# Altium PCB 400926.PcbDoc (part 2 of 7)
Units mm, origin at the board's own origin, x right, y up, seen from the top; angles counter-clockwise.
Board outline 148.5 x 63.5 mm, 4 copper layers (Top Layer, Mid-Layer 1, Mid-Layer 2, Bottom Layer), stack 1.514 mm thick; 311 components, 281 nets, 1495 pads, 2232 vias.
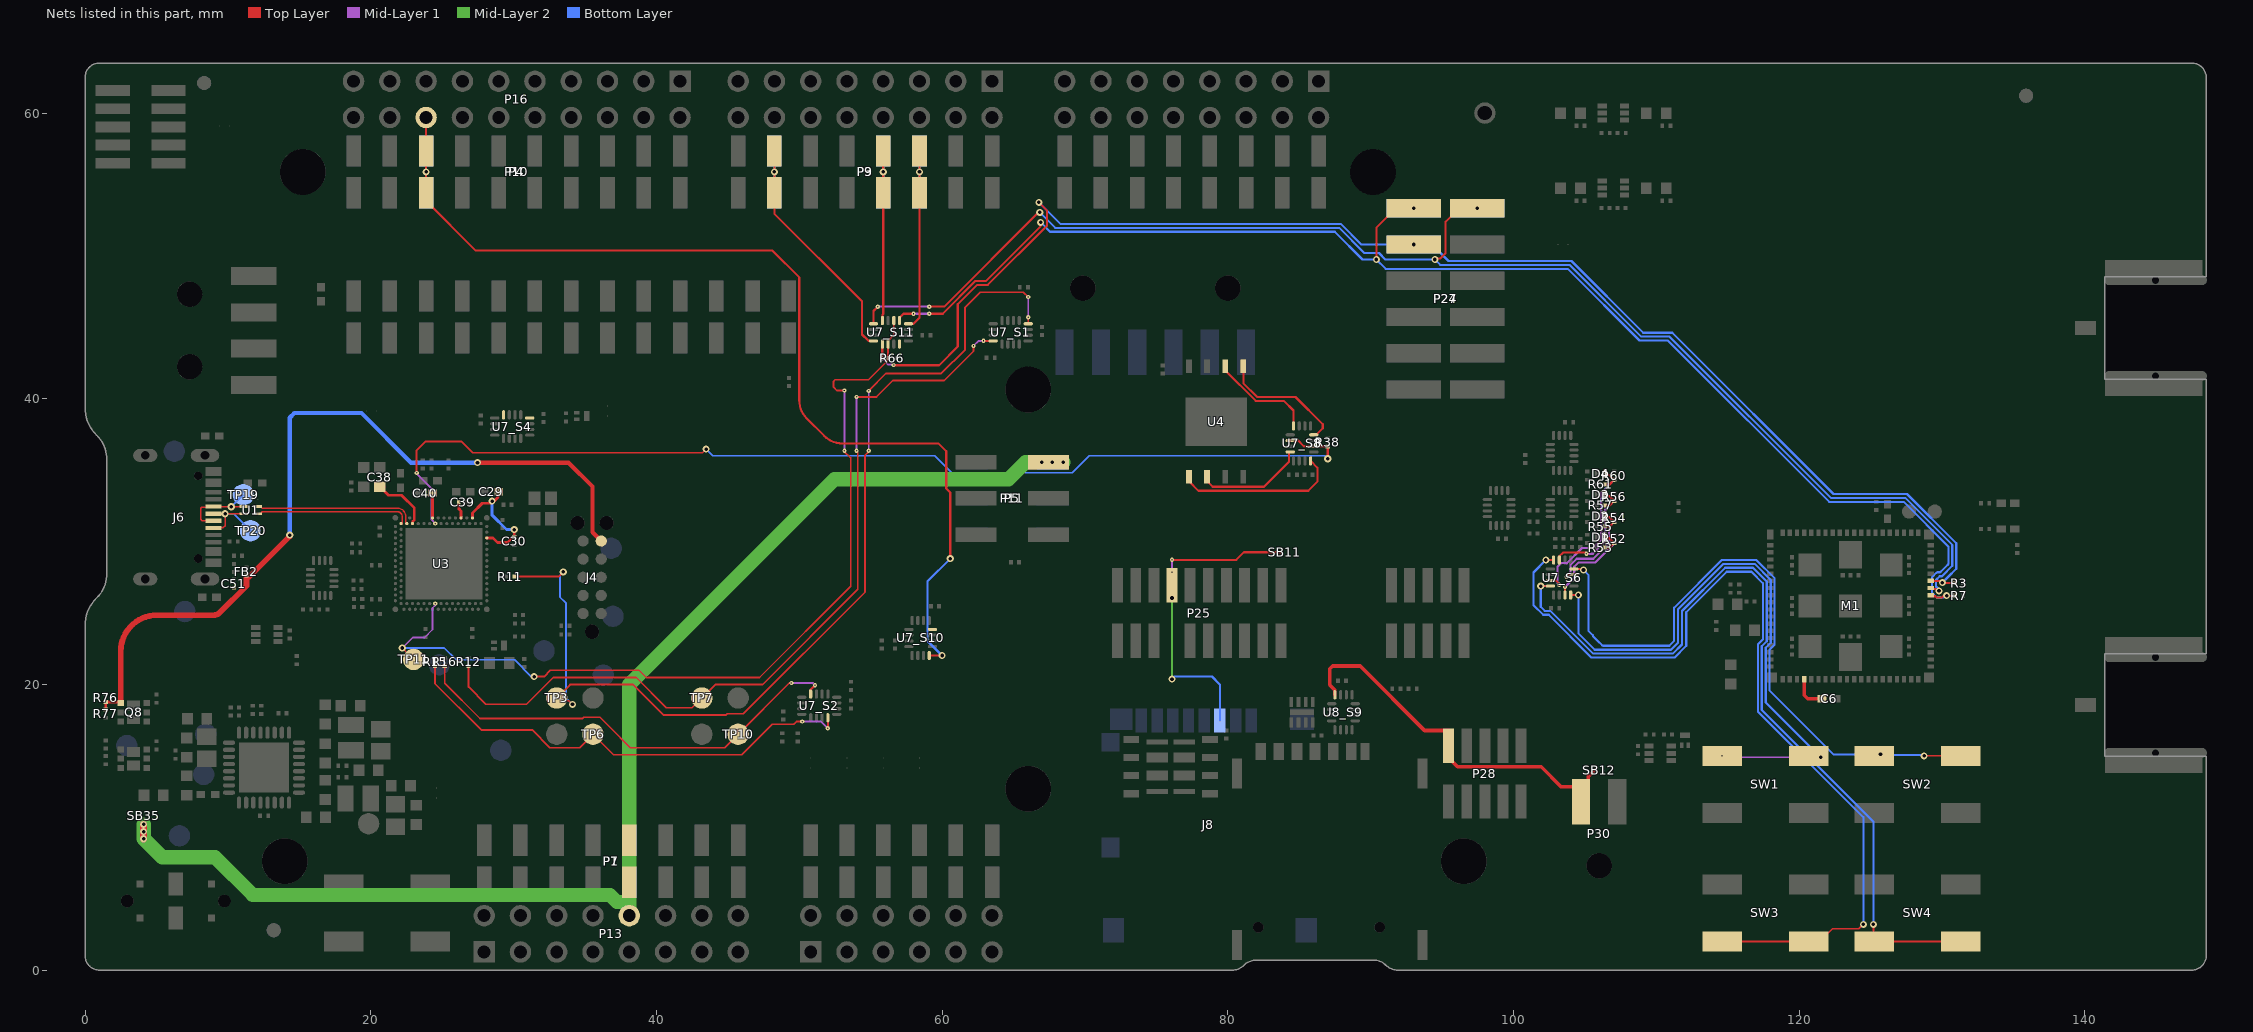
[diagram p4: the nets of this part, all layers, seen from the top]

## Footprints (in the part's own frame and the unit in brackets; to place one, negate y for a bottom-side part, rotate by r counter-clockwise, add the part's x,y. Pads: shape width x height; smd on the part's side, far side on the other; paste and mask are expansions set on the pad) (continued)
SOCKET_1x6_SMD [mm] "Socket, 2.54mm, SMD"
  rect 1.02x2.19 smd: 1(0,-1.465) 1(0,1.465) 2(2.54,-1.465) 2(2.54,1.465) 3(5.08,-1.465) 3(5.08,1.465) 4(7.62,-1.465) 4(7.62,1.465) 5(10.16,-1.465) 5(10.16,1.465) 6(12.7,1.465) 6(12.7,-1.465)
  silkscreen extent -1.27,-1.27 13.97,1.27, body extent -1.27,-2.29 13.97,2.29, height 7.47
SOCKET_1x8_SMD [mm] "Socket, 2.54mm, SMD"
  rect 1.02x2.19 smd: 1(0,-1.465) 1(0,1.465) 2(2.54,-1.465) 2(2.54,1.465) 3(5.08,-1.465) 3(5.08,1.465) 4(7.62,-1.465) 4(7.62,1.465) 5(10.16,-1.465) 5(10.16,1.465) 6(12.7,1.465) 6(12.7,-1.465) 7(15.24,-1.465) 7(15.24,1.465) 8(17.78,-1.465) 8(17.78,1.465)
  silkscreen extent -1.27,-1.27 19.05,1.27, body extent -1.27,-2.29 19.05,2.29, height 7.47
SOCKET_1x10_SMD [mm] "Socket, 2.54mm, SMD"
  rect 1.02x2.19 smd: 1(0,1.465) 1(0,-1.465) 2(2.54,-1.465) 2(2.54,1.465) 3(5.08,-1.465) 3(5.08,1.465) 4(7.62,-1.465) 4(7.62,1.465) 5(10.16,-1.465) 5(10.16,1.465) 6(12.7,-1.465) 6(12.7,1.465) 7(15.24,-1.465) 7(15.24,1.465) 8(17.78,-1.465) 8(17.78,1.465) 9(20.32,-1.465) 9(20.32,1.465) 10(22.86,-1.465) 10(22.86,1.465)
  silkscreen extent -1.27,-1.27 24.13,1.27, body extent -1.27,-2.29 24.13,2.29, height 7.47
SOCKET_2x3_SMD-2.54mm-NC [mm] "Socket, 2.54mm, SMD"
  rect 1.02x2.22 smd: 1(2.54,-2.825) 2(2.54,2.825) 3(0,-2.825) 4(0,2.825) 5(-2.54,-2.825) 6(-2.54,2.825)
  silkscreen extent -3.81,-3.3 3.81,2.54
SOCKET_2x6_SMD-2.54mm#1 [mil]
  rect 50x150 smd: 1(-250,-87.5) 2(-250,87.5) 3(-150,-87.5) 4(-150,87.5) 5(-50,-87.5) 6(-50,87.5) 7(50,-87.5) 8(50,87.5) 9(150,-87.5) 10(150,87.5) 11(250,-87.5) 12(250,87.5)
  silkscreen extent -310,-127 300,100, body extent -300,-138 300,139, height 290
SOCKET_2x6_SMD-2.54mm#2 [mil] "Board-Board Conn, Header, 4-way, 2-row"
  rect 50x150 smd: 1(-250,87.5) 2(-250,-87.5) 3(-150,87.5) 4(-150,-87.5) 5(-50,87.5) 6(-50,-87.5) 7(50,87.5) 8(50,-87.5) 9(150,87.5) 10(150,-87.5) 11(250,87.5) 12(250,-87.5)
  silkscreen extent -310,-100 300,127
SODFL35X40-2N [mm] "SODFL, 2-Leads, Body 0,60x0,35mm, IPC Medium Density"
  rect 0.25x0.6 smd: 1(-0.325,0) 3(0.325,0)
  body extent -0.53,-0.33 0.53,0.33, height 0.4
Solderbridge [mil]
  round 1 smd paste-99999: 1(-13.78,0) 2(13.78,0)
  Top Layer region: -7.49,19.36 -15.76,15.74 -21.55,8.8 -23.62,0 -23.62,0 -21.55,-8.79 -15.76,-15.74 -7.49,-19.36 -7.49,-19.36 -6.18,-19.31 -5.02,-18.71 -4.22,-17.68 -3.94,-16.4 -3.94,-16.4 -3.94,16.4 -4.22,17.68 -5.02,18.71 -6.18,19.31 -7.49,19.36
  Top Layer region: 7.49,-19.36 15.76,-15.74 21.55,-8.8 23.62,0 23.62,0 21.55,8.79 15.76,15.74 7.49,19.36 7.49,19.36 6.18,19.31 5.02,18.71 4.22,17.68 3.94,16.4 3.94,16.4 3.94,-16.4 4.22,-17.68 5.02,-18.71 6.18,-19.31 7.49,-19.36
Solderbridge_Shorted [mil]
  round 1 smd paste-99999: 1(-13.78,0) 2(13.78,0)
  Top Layer region: -4.92,3.94 -4.92,-3.94 4.92,-3.94 4.92,3.94
  Top Layer region: -7.49,19.36 -15.76,15.74 -21.55,8.8 -23.62,0 -23.62,0 -21.55,-8.79 -15.76,-15.74 -7.49,-19.36 -7.49,-19.36 -6.18,-19.31 -5.02,-18.71 -4.22,-17.68 -3.94,-16.4 -3.94,-16.4 -3.94,16.4 -4.22,17.68 -5.02,18.71 -6.18,19.31 -7.49,19.36
  Top Layer region: 7.49,-19.36 15.76,-15.74 21.55,-8.8 23.62,0 23.62,0 21.55,8.79 15.76,15.74 7.49,19.36 7.49,19.36 6.18,19.31 5.02,18.71 4.22,17.68 3.94,16.4 3.94,16.4 3.94,-16.4 4.22,-17.68 5.02,-18.71 6.18,-19.31 7.49,-19.36
Solderbridge_Shorted_Power [mil]
  round 1 smd paste-99999: 1(-13.84,0.21) 2(13.72,0.21)
  Top Layer region: -4.92,9.84 4.92,9.84 4.92,-9.84 -4.92,-9.84
  Top Layer region: 7.43,-19.16 15.71,-15.53 21.49,-8.59 23.56,0.21 23.56,0.21 21.49,9 15.71,15.94 7.43,19.57 7.43,19.57 6.12,19.52 4.96,18.92 4.16,17.89 3.88,16.61 3.88,16.61 3.88,-16.2 4.16,-17.47 4.96,-18.51 6.12,-19.11 7.43,-19.16
  Top Layer region: -7.54,19.57 -15.82,15.94 -21.61,9 -23.68,0.21 -23.68,0.21 -21.61,-8.59 -15.82,-15.53 -7.54,-19.16 -7.54,-19.16 -6.24,-19.11 -5.08,-18.51 -4.28,-17.47 -4,-16.2 -3.99,-16.2 -3.99,16.61 -4.28,17.89 -5.08,18.92 -6.24,19.52 -7.54,19.57
SON50P210X160X65_HS-9N [mm] "SON, 8-Leads, Body 2.10x1.60mm, Pitch 0.50mm, Thermal Pad 1.70x0.4mm, IPC Medium Density"
  rect 0.7x0.25 smd mask+0.05: 1(-0.725,0.75) 2(-0.725,0.25) 3(-0.725,-0.25) 4(-0.725,-0.75) 5(0.725,-0.75) 6(0.725,-0.25) 7(0.725,0.25) 8(0.725,0.75)
  rect 0.4x1.7 smd paste-2 mask+0.05: 9(0,0)
  rect 0.3x0.75 on Top Paste: ""(0,0.425) ""(0,-0.425)
  silkscreen extent -1.26,1.2 -1.16,1.26, body extent -0.85,-1.1 0.85,1.1, height 0.65
SON127P600X90_HS-8N [mm] "SON, 8-Leads, Body 5.00x6.00mm, Pitch 1.27mm, IPC Medium Density"
  rect 1.5x0.35 smd paste-1.27: 0(-0.95,-1.73) 0(-0.95,1.73) 0(0.95,-1.73) 0(0.95,1.73)
  rect 1.5x0.7 smd paste-1.27: 0(-0.95,-0.635) 0(-0.95,0.635) 0(0.95,-0.635) 0(0.95,0.635)
  rect 1.1x0.5 smd paste-1.27: 1(-2.75,1.905) 2(-2.75,0.635) 3(-2.75,-0.635) 4(-2.75,-1.905) 5(2.75,-1.905) 6(2.75,-0.635) 7(2.75,0.635) 8(2.75,1.905)
  silkscreen extent -3.6,-2.58 3.08,2.72, body extent -3,-2.5 3,2.5, height 0.65
SON127P800X80_HS-9N [mm] "SON, 8-Leads, Body 6.00x8.00mm, Pitch 1.27mm, Thermal Pad 4.30x3.40mm, IPC Medium Density"
  rect 0.95x0.4 smd: 1(-3.87,1.905) 2(-3.87,0.635) 3(-3.87,-0.635) 4(-3.87,-1.905) 5(3.87,-1.905) 6(3.87,-0.635) 7(3.87,0.635) 8(3.87,1.905)
  rect 3.4x4.3 smd paste-1.7: 9(0,0)
  silkscreen extent -4.52,-3.18 4.18,3.52, body extent -4.05,-3.05 4.05,3.05, height 0.8
SOTFL50P162X60-6N [mm] "SOTFL, 6-Leads, Body 1.60x1.63mm, Pitch 0.50mm, IPC Medium Density"
  rect 0.65x0.35 smd: 1(-0.775,0.5) 2(-0.775,0) 3(-0.775,-0.5) 4(0.775,-0.5) 5(0.775,0) 6(0.775,0.5)
  silkscreen extent -0.9,-0.82 0.05,1.35, body extent -0.81,-0.85 0.81,0.85, height 0.6
TC2050-IDC-NLFP [mil]
  round 39 hole 39 unplated: 0(-150,0) 0(150,-40) 0(150,40)
  round 31 smd paste-196.85: 1(-100,-25) 2(-50,-25) 3(0,-25) 4(50,-25) 5(100,-25) 6(100,25) 7(50,25) 8(0,25) 9(-50,25) 10(-100,25)
  Top Layer pour cut-out: -100,25 -100,-25 100,-25 100,25
TESTPAD-TH [mm]
  round 1.5 hole 1: 1(0,0)
TP_SMD_D1.0mm [mm] "Test point - pad 1.0mm"
  round 1 smd paste-5: 1(0,0)
TP_SMD_D1.5mm [mm] "Test point - pad 1.5mm"
  round 1.5 smd paste-5: 1(0,0)
  body extent -0.75,-0.75 0.75,0.75, height 0.05
UFDFN50P120X250X55-8N [mm]
  round 0.025 smd: 1(-0.5,0.75) 4(-0.5,-0.75) 5(0.5,-0.75) 8(0.5,0.75)
  rect 0.6x0.2 smd: 2(-0.5,0.25) 3(-0.5,-0.25) 6(0.5,-0.25) 7(0.5,0.25)
  Top Layer region: -0.2,0.65 -0.8,0.65 -0.8,0.85 -0.4,0.85 -0.4,1.05 -0.2,1.05
  Top Layer region: 0.4,0.85 0.8,0.85 0.8,0.65 0.2,0.65 0.2,1.05 0.4,1.05
  Top Layer region: -0.2,-1.05 -0.4,-1.05 -0.4,-0.85 -0.8,-0.85 -0.8,-0.65 -0.2,-0.65
  Top Layer region: 0.8,-0.85 0.4,-0.85 0.4,-1.05 0.2,-1.05 0.2,-0.65 0.8,-0.65
  silkscreen extent -1.08,1.21 -0.95,1.33, body extent -0.6,-1.25 0.6,1.25, height 0.6
WEEE_3x4.5mm [mm]
  silkscreen extent -1.47,-2.7 1.47,1.71
XQFN40P180X260X50-16N [mm] "QFN, 16-Leads, Body 1.80x2.60mm, Pitch 0.40mm, IPC Medium Density"
  oval 0.65x0.22 smd paste-0.02 mask+0.04: 1(-0.825,0.6) 2(-0.825,0.2) 3(-0.825,-0.2) 4(-0.825,-0.6) 9(0.825,-0.6) 10(0.825,-0.2) 11(0.825,0.2) 12(0.825,0.6)
  oval 0.22x0.65 smd paste-0.02 mask+0.04: 5(-0.6,-1.225) 6(-0.2,-1.225) 7(0.2,-1.225) 8(0.6,-1.225) 13(0.6,1.225) 14(0.2,1.225) 15(-0.2,1.225) 16(-0.6,1.225)
  body extent -0.91,-1.31 0.91,1.31, height 0.55

## Part data
C1 C2: library part C0201-1µ0-10V-X5R-GRM033R61A105ME15, "Capacitor, X5R, ±20%, 10V", Manufacturer=Murata, Manufacturer Part Number=GRM033R61A105ME15, Part number IPS=N.A., Part number NEMS=100200545, Supplier Part Number 1=490-13226-1-ND, Artikkelnr Noca=N.A., Author=rubr, Component Class=Capacitors, Component Status=Active, ComponentLink1Description=Datasheet, ComponentLink1URL=https://search.murata.co.jp/Ceramy/image/img/A01X/G101/ENG/GRM033R61A105ME15-01.pdf, ComponentLink2Description="Supplier link", ComponentLink2URL=N.A., Footprint Doc=0201, HelpURL=https://www.murata.com/en-us/products/productdetail?partno=GRM033R61A105ME15%23, LatestRevisionDate=2023-03-22, Note=10V, Pad Count=2, Part Number=C0201-1µ0-10V-X5R-GRM033R61A105ME15, Part number Norautron=N.A., PartId=100200545, Published=2023-03-22, Supplier 1=Digi-Key, Supplier 2=N.A., Supplier Part Number 2=N.A.
C3 C7: library part C0603-10µ-10V-X6S-GRM188C81A106MA73, "Capacitor, Ceramic, 10µF 10V X6S 0603,±20%", Manufacturer=Murata, Manufacturer Part Number=GRM188C81A106MA73, Part number IPS=N.A., Part number NEMS=100200520, Supplier Part Number 1=490-7197-2-ND, Artikkelnr Noca=N.A., Author=prbu, Component Class=Capacitors, Component Status=Active, ComponentLink1Description=Datasheet, ComponentLink1URL=https://www.murata.com/en-sg/products/productdetail?partno=GRM188C81A106MA73%23, ComponentLink2Description="Supplier link", ComponentLink2URL=https://www.digikey.com/en/products/detail/murata-electronics/GRM188C81A106MA73D/3900461, Footprint Doc=0603, HelpURL=N.A., LatestRevisionDate=2022-07-01, Note=10V, Pad Count=2, Part Number=C0603-10µ-10V-X6S-GRM188C81A106MA73, Part number Norautron=N.A., PartId=100200520, Published=2022-07-01, Supplier 1=Digi-Key, Supplier 2=Mouser, Supplier Part Number 2=81-GRM188C81A106MA3D
C4 C8 C10 C24 C25 C26 C27 C31 C32 C33 C34 C39 C42 C43 C51 C52_S1 C52_S2 C52_S3 C52_S4 C52_S5 C52_S6 C52_S8 C52_S10 C52_S11 C53_S7 C53_S9 C62: library part C0201-100n, "Capacitor, X5R, ±10%, 100nF, 16V", Manufacturer=N.A., Part number IPS="00000001248, 00000002505", Part number NEMS=100200078, Part number Norautron=262071862, Artikkelnr Noca=N.A., Author=rsk, Component Class=Capacitors, Component Status=Active, ComponentLink1Description=Datasheet, ComponentLink1URL=N.A., ComponentLink2Description="Supplier link", ComponentLink2URL=N.A., Footprint Doc=0201, HelpURL=N.A., LatestRevisionDate=2024-06-27, Manufacturer Part Number=N.A., Note=16V, Pad Count=2, Part Number=C0201-100n, PartId=100200078, Published=2014-11-13, Supplier 1=N.A., Supplier 2=N.A., Supplier Part Number 1=N.A., Supplier Part Number 2=N.A.
C5 C6: library part C0402-4µ7-10V-X5R, "Capacitor, X5R, 10V", Manufacturer=Murata, Manufacturer Part Number=GRM155R61A475MEAAD, Part number IPS=N.A., Part number NEMS=100200415, Supplier Part Number 1=490-14306-1-ND, Artikkelnr Noca=N.A., Author=rsk, Component Class=Capacitors, Component Status=Active, ComponentLink1Description=Datasheet, ComponentLink1URL=http://search.murata.co.jp/Ceramy/image/img/A01X/G101/ENG/GRM155R61A475MEAA-01.pdf, ComponentLink2Description="Supplier link", ComponentLink2URL=https://www.digikey.com/product-detail/en/murata-electronics-north-america/GRM155R61A475MEAAD/490-14306-1-ND/6234742, Footprint Doc=0402, HelpURL=https://psearch.en.murata.com/capacitor/product/GRM155R61A475MEAA%23.html, LatestRevisionDate=2020-10-13, Note=10V, Pad Count=2, Part Number=C0402-4µ7-10V-X5R, Part number Norautron=N.A., PartId=100200415, Published=2018-10-04, Supplier 1=Digi-Key, Supplier 2=N.A., Supplier Part Number 2=N.A.
C9: library part C0402-1µ0-16V-X5R, "Capacitor, Ceramic, X5R, ±10%, 16V", Manufacturer=Murata, Manufacturer Part Number=GRT155R61C105KE01D, Part number IPS=N.A., Part number NEMS=100200452, Supplier Part Number 1=490-12255-1-ND, Artikkelnr Noca=N.A., Author=rsk, Component Class=Capacitors, Component Status=Active, ComponentLink1Description=Datasheet, ComponentLink1URL=https://search.murata.co.jp/Ceramy/image/img/A01X/G101/ENG/GRT155R61C105KE01-01.pdf, ComponentLink2Description="Supplier link", ComponentLink2URL=https://www.murata.com/en-global/products/productdetail?partno=GRT155R61C105KE01%23, Footprint Doc=0402, HelpURL=N.A., LatestRevisionDate=2020-12-15, Note=16V, Pad Count=2, Part Number=C0402-1µ0-16V-X5R, Part number Norautron=N.A., PartId=100200452, Published=2020-12-15, Supplier 1=Digi-Key, Supplier 2=Mouser, Supplier Part Number 2=81-GRT155R61C105KE1D
C11 C12: library part C0201-39p, "Capacitor, NP0, ±1%, 25V", Manufacturer=Murata, Manufacturer Part Number=GRM0335C1E390FA01D, Part number IPS=00000001668, Part number NEMS=100200039, Part number Norautron=N.A., Artikkelnr Noca=N.A., Author=rsk, Component Class=Capacitors, Component Status=Active, ComponentLink1Description=Datasheet, ComponentLink1URL=N.A., ComponentLink2Description="Supplier link", ComponentLink2URL=N.A., Footprint Doc=0201, HelpURL=N.A., LatestRevisionDate=2019-04-16, Note=25V, Pad Count=2, Part Number=C0201-39p, PartId=100200039, Published=2019-04-16, Supplier 1=N.A., Supplier 2=N.A., Supplier Part Number 1=N.A., Supplier Part Number 2=N.A.
C19 C49: library part C0201-N.C., "Not mounted", Manufacturer=N.A., Part number NEMS=100200001, Artikkelnr Noca=N.A., Assembly="Not mounted", Author=rsk, Component Class=Capacitors, Component Status=Active, ComponentLink1Description=Datasheet, ComponentLink1URL=N.A., ComponentLink2Description="Supplier link", ComponentLink2URL=N.A., Footprint Doc=0201, HelpURL=N.A., LatestRevisionDate=2014-11-13, Manufacturer Part Number=N.A., Note="Chip Cap", Pad Count=2, Part Number=C0201-N.C., Part number IPS=N.A., Part number Norautron=N.A., PartId=100200001, Published=2014-11-13, Supplier 1=N.A., Supplier 2=N.A., Supplier Part Number 1=N.A., Supplier Part Number 2=N.A.
C28 C29 C35 C36 C40 C64: library part C0402-1µ0-10V-X5R, "Capacitor, Ceramic, X5R, ±10%, 10V", Manufacturer=N.A., Part number NEMS=100200482, Artikkelnr Noca=N.A., Author=rubr, Component Class=Capacitors, Component Status=Active, ComponentLink1Description=Datasheet, ComponentLink1URL=N.A., ComponentLink2Description="Supplier link", ComponentLink2URL=N.A., Footprint Doc=0402, HelpURL=N.A., LatestRevisionDate=2021-07-22, Manufacturer Part Number=N.A., Note=10V, Pad Count=2, Part Number=C0402-1µ0-10V-X5R, Part number IPS=N.A., Part number Norautron=N.A., PartId=100200482, Published=2021-07-22, Supplier 1=N.A., Supplier 2=N.A., Supplier Part Number 1=N.A., Supplier Part Number 2=N.A.
C30: library part C0201-2n2, "Capacitor, X7R, ±10%, 10V", Manufacturer=N.A., Part number IPS=00000001778, Part number NEMS=100200060, Part number Norautron=26470002, Artikkelnr Noca=N.A., Author=rsk, Component Class=Capacitors, Component Status=Active, ComponentLink1Description=Datasheet, ComponentLink1URL=N.A., ComponentLink2Description="Supplier link", ComponentLink2URL=N.A., Footprint Doc=0201, HelpURL=N.A., LatestRevisionDate=2014-11-13, Manufacturer Part Number=N.A., Note=10V, Pad Count=2, Part Number=C0201-2n2, PartId=100200060, Published=2014-11-13, Supplier 1=N.A., Supplier 2=N.A., Supplier Part Number 1=N.A., Supplier Part Number 2=N.A.
C37 C38 C58: library part C0603-4µ7-10V-X5R, "Capacitor, Ceramic, X5R, ±10%, 10V", Manufacturer=N.A., Part number NEMS=100200479, Part number Norautron=262081761, Artikkelnr Noca=N.A., Author=rubr, Component Class=Capacitors, Component Status=Active, ComponentLink1Description=Datasheet, ComponentLink1URL=N.A., ComponentLink2Description="Supplier link", ComponentLink2URL=N.A., Footprint Doc=0603, HelpURL=N.A., LatestRevisionDate=2021-07-22, Manufacturer Part Number=N.A., Note=10V, Pad Count=2, Part Number=C0603-4µ7-10V-X5R, Part number IPS=N.A., PartId=100200479, Published=2021-07-22, Supplier 1=N.A., Supplier 2=N.A., Supplier Part Number 1=N.A., Supplier Part Number 2=N.A.
C41 C48 C50: library part C0201-10n, "Capacitor, X7R, ±10%, 10nF, 10V", Manufacturer=N.A., Part number IPS=00000003480, Part number NEMS=100200067, Part number Norautron=26621779, Artikkelnr Noca=N.A., Author=rsk, Component Class=Capacitors, Component Status=Active, ComponentLink1Description=Datasheet, ComponentLink1URL=N.A., ComponentLink2Description="Supplier link", ComponentLink2URL=N.A., Footprint Doc=0201, HelpURL=N.A., LatestRevisionDate=2024-06-27, Manufacturer Part Number=N.A., Note=10V, Pad Count=2, Part Number=C0201-10n, PartId=100200067, Published=2014-11-13, Supplier 1=N.A., Supplier 2=N.A., Supplier Part Number 1=N.A., Supplier Part Number 2=N.A.
C44 C45 C46 C47: library part C0201-1µ0, "Capacitor, X5R, ±10%", Manufacturer=N.A., Part number IPS=00000001723, Part number NEMS=100200084, Supplier Part Number 1=1276-6795-1-ND, Artikkelnr Noca=N.A., Author=rsk, Component Class=Capacitors, Component Status=Active, ComponentLink1Description=Datasheet, ComponentLink1URL=N.A., ComponentLink2Description="Supplier link", ComponentLink2URL=N.A., Footprint Doc=0201, HelpURL=N.A., LatestRevisionDate=2016-08-22, Manufacturer Part Number=N.A., Note=10V, Pad Count=2, Part Number=C0201-1µ0, Part number Norautron=N.A., PartId=100200084, Published=2009-05-08, Supplier 1=Digi-Key, Supplier 2=N.A., Supplier Part Number 2=N.A.
C54: library part C0603-1µ0-10V-X5R, "Capacitor, Ceramic, 1.0µF 10V X5R 0603,±10%", Manufacturer=N.A., Part number NEMS=100200528, Artikkelnr Noca=N.A., Author=getr, Component Class=Capacitors, Component Status=Active, ComponentLink1Description=Datasheet, ComponentLink1URL=N.A., ComponentLink2Description="Supplier link", ComponentLink2URL=N.A., Footprint Doc=0603, HelpURL=N.A., LatestRevisionDate=2022-10-06, Manufacturer Part Number=N.A., Note=10V, Pad Count=2, Part Number=C0603-1µ0-10V-X5R, Part number IPS=N.A., Part number Norautron=N.A., PartId=100200528, Published=2022-10-06, Supplier 1=N.A., Supplier 2=N.A., Supplier Part Number 1=N.A., Supplier Part Number 2=N.A.
C55 C56 C57 C59 C60: library part C0603-10µ-10V-X7T-GRM188D71A106MA73, "Capacitor, X7T, ±20%, 10V", Manufacturer=Murata, Manufacturer Part Number=GRM188D71A106MA73D, Part number IPS=00000004696, Part number NEMS=100200414, Part number Norautron=N.A., Supplier Part Number 1=490-7200-1-ND, Artikkelnr Noca=N.A., Author=rsk, Component Class=Capacitors, Component Status=Active, ComponentLink1Description=Datasheet, ComponentLink1URL=N.A., ComponentLink2Description="Supplier link", ComponentLink2URL=N.A., Footprint Doc=0603, HelpURL=https://no.mouser.com/datasheet/2/281/murata_03052018_GRM_Series_1-1310166.pdf, LatestRevisionDate=2021-07-22, Note=10VDC, Pad Count=2, Part Number=C0603-10µ-10V-X7T-GRM188D71A106MA73, PartId=100200414, Published=2018-09-11, Supplier 1=Digi-Key, Supplier 2=Mouser, Supplier Part Number 2=81-GRM188D71A106MA3D
C61 C63: library part C0402-10n, "Capacitor, X7R, ±10%", Manufacturer=N.A., Part number IPS=00000007784, Part number NEMS=100200173, Artikkelnr Noca=20039166, Author=rsk, Component Class=Capacitors, Component Status=Active, ComponentLink1Description=Datasheet, ComponentLink1URL=N.A., ComponentLink2Description="Supplier link", ComponentLink2URL=N.A., Footprint Doc=0402, HelpURL=N.A., LatestRevisionDate=2009-11-23, Manufacturer Part Number=N.A., Note=16V, Pad Count=2, Part Number=C0402-10n, Part number Norautron=N.A., PartId=100200173, Published=2009-05-08, Supplier 1=N.A., Supplier 2=N.A., Supplier Part Number 1=N.A., Supplier Part Number 2=N.A.
C65 C66 C67: library part C0201-1n0, "Capacitor, X7R, ±10%, 25V", Manufacturer=N.A., Part number IPS=00000003206, Part number NEMS=100200056, Artikkelnr Noca=N.A., Author=rsk, Component Class=Capacitors, Component Status=Active, ComponentLink1Description=Datasheet, ComponentLink1URL=N.A., ComponentLink2Description="Supplier link", ComponentLink2URL=N.A., Footprint Doc=0201, HelpURL=N.A., LatestRevisionDate=2020-10-13, Manufacturer Part Number=N.A., Note=16V, Pad Count=2, Part Number=C0201-1n0, Part number Norautron=N.A., PartId=100200056, Published=2014-11-13, Supplier 1=N.A., Supplier 2=N.A., Supplier Part Number 1=N.A., Supplier Part Number 2=N.A.
C68 C69 C71: library part C0603-N.C., "Not mounted", Manufacturer=N.A., Part number NEMS=100200195, Artikkelnr Noca=N.A., Assembly="Not mounted", Author=rsk, Component Class=Capacitors, Component Status=Active, ComponentLink1Description=Datasheet, ComponentLink1URL=N.A., ComponentLink2Description="Supplier link", ComponentLink2URL=N.A., Footprint Doc=0603, HelpURL=N.A., LatestRevisionDate=2009-05-08, Manufacturer Part Number=N.A., Note="Chip Cap", Pad Count=2, Part Number=C0603-N.C., Part number IPS=N.A., Part number Norautron=N.A., PartId=100200195, Published=2009-05-08, Supplier 1=N.A., Supplier 2=N.A., Supplier Part Number 1=N.A., Supplier Part Number 2=N.A.
C70 C72: library part C0603-100n, "Chip Cap 0603", Manufacturer=N.A., Part number NEMS=100200265, Artikkelnr Noca=N.A., Author=rsk, Component Class=Capacitors, Component Status=Active, ComponentLink1Description=Datasheet, ComponentLink1URL=N.A., ComponentLink2Description="Supplier link", ComponentLink2URL=N.A., Footprint Doc=0603, HelpURL=N.A., LatestRevisionDate=2009-05-08, Manufacturer Part Number=N.A., Note="Chip Cap 1%", Pad Count=2, Part Number=C0603-100n, Part number IPS=N.A., Part number Norautron=N.A., PartId=100200265, Published=2009-05-08, Supplier 1=N.A., Supplier 2=N.A., Supplier Part Number 1=N.A., Supplier Part Number 2=N.A.
D1 D2 D3 D4: "DIODE SCHOTTKY 20V 500MA SOD882", Manufacturer="Central Semiconductor Corp.", Part number IPS=00000002493, Part number NEMS=101300101, Part number Norautron=N.A., Supplier Part Number 1="CFSH05-20L CT-ND", Artikkelnr Noca=N.A., Author=rsk, Component Class=Semiconductors, Component Status=Active, ComponentLink1Description=Datasheet, ComponentLink1URL=N.A., ComponentLink2Description="Supplier link", ComponentLink2URL=N.A., Footprint Doc=SOD-882L, HelpURL=http://www.centralsemi.com/PDFs/products/CFSH05-20L.PDF, LatestRevisionDate=2015-01-30, Manufacturer Part Number=CFSH05-20L, Note=N.A., Pad Count=2, Part Number=CFSH05-20L, PartId=101300101, Published=2015-01-30, Supplier 1=Digi-Key, Supplier 2=N.A., Supplier Part Number 2=N.A.
D5: "ESD Protection and EMI Filter for SIM Card Interface", Manufacturer="Texas Instruments", Part number IPS=N.A., Part number NEMS=101900729, Supplier Part Number 1=296-28299-1-ND, Artikkelnr Noca=N.A., Author=rubr, Component Class=Misc_ICs, Component Status=Active, ComponentLink1Description=Datasheet, ComponentLink1URL=https://www.ti.com/lit/ds/symlink/tpd3f303.pdf, ComponentLink2Description="Supplier link", ComponentLink2URL=https://www.digikey.com/en/products/detail/texas-instruments/TPD3F303DPVR/2605055, Footprint Doc=USON-8, HelpURL=https://www.ti.com/product/TPD3F303/part-details/TPD3F303DPVR, LatestRevisionDate=2022-10-19, Manufacturer Part Number=TPD3F303DPVR, Note=N.A., Pad Count=8, Part Number=TPD3F303DPVR, Part number Norautron=N.A., PartId=101900729, Published=2022-10-19, Supplier 1=Digi-Key, Supplier 2=Mouser, Supplier Part Number 2=595-TPD3F303DPVR
FB1: library part FB0603-22R@100MHz-6000mA, "Ferrite Bead, 22 Ohm @ 100MHz, 6000mA, 8 mOhm Max", Manufacturer=Murata, Manufacturer Part Number=BLM18SD220SN1D, Part number IPS=N.A., Part number NEMS=100300492, Supplier Part Number 1=490-15633-2-ND, Artikkelnr Noca=N.A., Author=kod1, Component Class=Inductors, Component Status=Active, ComponentLink1Description=Datasheet, ComponentLink1URL=N.A., ComponentLink2Description="Supplier link", ComponentLink2URL=https://www.murata.com/en-us/products/productdata/8796738650142/ENFA0003.pdf, Footprint Doc=0603, HelpURL=http://www.murata.com/en-global/products/productdata/8796733767710/S0580E.pdf, LatestRevisionDate=2024-01-25, Note="Chip EMIFIL Inductor Type Chip Ferrite Bead", Pad Count=2, Part Number=FB0603-22R@100MHz-6000mA, Part number Norautron=N.A., PartId=100300492, Published=2024-01-25, Supplier 1=Digi-Key, Supplier 2=N.A., Supplier Part Number 2=N.A.
FB2: library part FB0201-120R@100M-900mA-BLM03PX121SN1D, "Ferrite Bead, 120 Ohm @ 100MHz, 900mA, 160 mOhm Max", Manufacturer=Murata, Manufacturer Part Number=BLM03PX121SN1D, Part number IPS=N.A., Part number NEMS=100300405, Supplier Part Number 1=490-BLM03PX121SN1DTR-ND, Artikkelnr Noca=N.A., Author=rubr, Component Class=Inductors, Component Status=Active, ComponentLink1Description=Datasheet, ComponentLink1URL=https://www.murata.com/en-us/products/productdata/8796741140510/ENFA0020.pdf, ComponentLink2Description="Supplier link", ComponentLink2URL=N.A., Footprint Doc=0201, HelpURL=N.A., LatestRevisionDate=2022-01-19, Note=N.A., Pad Count=2, Part Number=FB0201-120R@100M-900mA-BLM03PX121SN1D, Part number Norautron=N.A., PartId=100300405, Published=2022-01-19, Supplier 1=Digi-Key, Supplier 2=N.A., Supplier Part Number 2=N.A.
FB4 FB5 FB6: library part R0805-0R, "Resistor, ±5%, 0.125W", Manufacturer=N.A., Part number NEMS=100100375, Artikkelnr Noca=27089000, Author=rsk, Component Class=Resistors, Component Status=Active, ComponentLink1Description=Datasheet, ComponentLink1URL=N.A., ComponentLink2Description="Supplier link", ComponentLink2URL=N.A., Footprint Doc=0805, HelpURL=N.A., LatestRevisionDate=2013-06-04, Manufacturer Part Number=N.A., Note="Chip Res 5%", Pad Count=2, Part Number=R0805-0R, Part number IPS=N.A., Part number Norautron=N.A., PartId=100100375, Published=2009-05-08, Supplier 1=N.A., Supplier 2=N.A., Supplier Part Number 1=N.A., Supplier Part Number 2=N.A.
Fid1 Fid2 Fid3: library part Fid-Mark, "Fiducial Mark", Manufacturer=N.A., Part number NEMS=100500073, Artikkelnr Noca=N.A., Assembly="Not mounted", Author=rsk, Component Class=Connectors, Component Status=Active, ComponentLink1Description=Datasheet, ComponentLink1URL=N.A., ComponentLink2Description="Supplier link", ComponentLink2URL=N.A., Footprint Doc=Fiducial, HelpURL=N.A., LatestRevisionDate=2009-12-12, Manufacturer Part Number=N.A., Note=N.A., Pad Count=1, Part Number=Fid-Mark, Part number IPS=N.A., Part number Norautron=N.A., PartId=100500073, Published=2009-12-12, Supplier 1=N.A., Supplier 2=N.A., Supplier Part Number 1=N.A., Supplier Part Number 2=N.A., System=Connector
J1 J2: library part SMA-Edge-C02AJ3F64B-1, "SMA Jack, Female, 50 Ohm, Board Edge, Cutout, SMT", Manufacturer="Wellshow Technology", Manufacturer Part Number=C02AJ3F64B-1, Part number IPS=N.A., Part number NEMS=100500896, Artikkelnr Noca=N.A., Author=rubr, Component Class=Connectors, Component Status=Active, ComponentLink1Description=Datasheet, ComponentLink1URL=\\projectdisks\projects\app9717\Datasheet\connectors\Wellshow\C02AJ3F64B-1.pdf, ComponentLink2Description="Supplier link", ComponentLink2URL=N.A., Footprint Doc=C02AJ3F64B-1, HelpURL=N.A., LatestRevisionDate=2025-08-11, Note=N.A., Pad Count=2, Part Number=SMA-Edge-C02AJ3F64B-1, Part number Norautron=N.A., PartId=100500896, Published=2025-03-17, Supplier 1=Cabcon, Supplier 2=N.A., Supplier Part Number 1=C02AJ3F64B-1, Supplier Part Number 2=N.A., System=Connector
J4: library part TC2050-IDC-NLFP, "CBL PLUG-OF-NAILS 10-PIN", Manufacturer="Tag-Connect LLC", Part number IPS=N.A., Part number NEMS=100500463, Supplier Part Number 1=TC2050-IDC-NL-ND, Artikkelnr Noca=N.A., Author=rsk, Component Class=Connectors, Component Status=Active, ComponentLink1Description=Datasheet, ComponentLink1URL=N.A., ComponentLink2Description="Supplier link", ComponentLink2URL=N.A., Footprint Doc=TC2050-IDC-NLFP, HelpURL=http://www.tag-connect.com/Materials/TC2050-IDC%20Datasheet.pdf, LatestRevisionDate=2012-11-21, Manufacturer Part Number=TC2050-IDC-NLFP, Note=N.A., Pad Count=10, Part Number=TC2050-IDC-NLFP, Part number Norautron=N.A., PartId=100500463, Published=2012-11-21, Supplier 1=Digi-Key, Supplier 2=N.A., Supplier Part Number 2=N.A., System=Connector
J5: library part L-KLS1-SIM-066-(6+1)P-H1.37-R, "Nano SIM Card Connector, Push-Push, 6-Pin, H1.37mm, with CD Pin", Manufacturer="KLS Electronic", Part number IPS=N.A., Part number NEMS=100500776, Artikkelnr Noca=N.A., Author=rubr, Component Class=Connectors, Component Status=Active, ComponentLink1Description=Datasheet, ComponentLink1URL=https://klsele.com/admin/product_upload/20190123133741L-KLS1-SIM-066-(6+1)P-H1.37-R--.pdf, ComponentLink2Description="Supplier link", ComponentLink2URL=N.A., Footprint Doc=KLS1-SIM-066, HelpURL=https://klsele.com/products/connectors/SIM-card-connectors-Micro-SIM-card-connectors-Nano-SIM-Card-Connectors/4918.html, LatestRevisionDate=2023-01-01, Manufacturer Part Number=L-KLS1-SIM-066-(6+1)P-H1.37-R, Note=N.A., Pad Count=7, Part Number=L-KLS1-SIM-066-(6+1)P-H1.37-R, Part number Norautron=N.A., PartId=100500776, Published=2023-01-01, Supplier 1=Cabcon, Supplier 2=N.A., Supplier Part Number 1=L-KLS1-SIM-066-(6+1)P-H1.37-R, Supplier Part Number 2=N.A., System=Connector
J6: library part 80259-1021, "USB-C Receptacle, 16 Pin, USB 2.0", Manufacturer="Bellweather Electronic Corp.", Part number IPS=N.A., Part number NEMS=100500830, Artikkelnr Noca=N.A., Author=getr, Component Class=Connectors, Component Status=Active, ComponentLink1Description=Datasheet, ComponentLink1URL=\\hizz\pro\app9717\Datasheet\connectors\Bellwether\SD-80259-001_C.pdf, ComponentLink2Description="Supplier link", ComponentLink2URL=N.A., Footprint Doc=SD-80259-001, HelpURL=N.A., LatestRevisionDate=2024-03-26, Manufacturer Part Number=80259-1021, Note=N.A., Pad Count=16, Part Number=80259-1021, Part number Norautron=N.A., PartId=100500830, Published=2023-10-30, Supplier 1=Cabcon, Supplier 2=N.A., Supplier Part Number 1=80259-1021, Supplier Part Number 2=N.A., System=Connector
J8: library part Molex_502774-0891, "1.10mm Pitch microSD Memory Card Connector, Reverse Mount Surface Mount, Push-Push Type", Manufacturer=Molex, Manufacturer Part Number=502774-0891, Part number IPS=00000001284, Part number NEMS=100500509, Part number Norautron=N.A., Supplier Part Number 1=WM24066CT-ND, Artikkelnr Noca=N.A., Assembly="Not mounted", Author=rsk, Component Class=Connectors, Component Status=Active, ComponentLink1Description=Datasheet, ComponentLink1URL=http://www.molex.com/pdm_docs/sd/5027740891_sd.pdf, ComponentLink2Description="Supplier link", ComponentLink2URL=N.A., Footprint Doc="Molex 502774-0891", HelpURL=https://www.molex.com/molex/products/part-detail/memory_card_socket/5027740891, LatestRevisionDate=2020-02-06, Note=N.A., Pad Count=14, Part Number=Molex_502774-0891, PartId=100500509, Published=2017-11-08, Supplier 1=Digi-Key, Supplier 2=Elfa, Supplier Part Number 2=300-76-403, System=Connector
L3: library part L0402-68n-Wirewound-Murata, "Inductor, 140mA, ±2%, 1960mΩ, Q=20", Manufacturer=Murata, Manufacturer Part Number=LQW15AN68NG00, Part number IPS=00000002494, Part number NEMS=100300389, Part number Norautron=N.A., Supplier Part Number 1=490-6837-1-ND, Artikkelnr Noca=N.A., Author=rsk, Component Class=Inductors, Component Status=Active, ComponentLink1Description=Datasheet, ComponentLink1URL=https://search.murata.co.jp/Ceramy/image/img/P02/JELF243A-0050.pdf, ComponentLink2Description="Supplier link", ComponentLink2URL=N.A., Footprint Doc=0402, HelpURL=https://psearch.en.murata.com/inductor/product/LQW15AN68NG00%23.html, LatestRevisionDate=2019-04-16, Note="-55°C ~ 125°C", Pad Count=2, Part Number=L0402-68n-Wirewound-Murata, PartId=100300389, Published=2019-04-16, Supplier 1=Digi-Key, Supplier 2=N.A., Supplier Part Number 2=N.A.
L4: library part L0402-N.C., "Not mounted", Manufacturer=N.A., Part number NEMS=100300037, Artikkelnr Noca=N.A., Assembly="Not mounted", Author=rsk, Component Class=Inductors, Component Status=Active, ComponentLink1Description=Datasheet, ComponentLink1URL=N.A., ComponentLink2Description="Supplier link", ComponentLink2URL=N.A., Footprint Doc=0402, HelpURL=N.A., LatestRevisionDate=2016-11-24, Manufacturer Part Number=N.A., Note=N.A., Pad Count=2, Part Number=L0402-N.C., Part number IPS=N.A., Part number Norautron=N.A., PartId=100300037, Published=2016-11-24, Supplier 1=N.A., Supplier 2=N.A., Supplier Part Number 1=N.A., Supplier Part Number 2=N.A.
L7 L8: library part L0806-2µ2-2500mA-73mOhm-CIGT201610EH2R2MNE, "Inductor, Irms=2.5A, Isat=2.9A, ±20%, DCR=73mΩ", Manufacturer="Samsung Electro-Mechanics America", Manufacturer Part Number=CIGT201610EH2R2MNE, Part number IPS=N.A., Part number NEMS=100300400, Part number Norautron=26521789, Supplier Part Number 1=1276-6901-1-ND, Artikkelnr Noca=N.A., Author=rsk, Component Class=Inductors, Component Status=Active, ComponentLink1Description=Datasheet, ComponentLink1URL=https://media.digikey.com/pdf/Data%20Sheets/Samsung%20PDFs/CIGT201610EH2R2MNE_Spec.pdf, ComponentLink2Description="Supplier link", ComponentLink2URL=https://www.digikey.com/en/products/detail/samsung-electro-mechanics/CIGT201610EH2R2MNE/7041223?s=N4IgTCBcDaIMIEkDiAVMAGAjANk%2BgogBJgBKYAsgHL4gC6AvkA, Footprint Doc=0806, HelpURL=http://product.samsungsem.com/pi/CIGT201610EH2R2MN.do, LatestRevisionDate=2022-09-07, Note="Unshielded Thin Film Inductor", Pad Count=2, Part Number=L0806-2µ2-2500mA-73mOhm-CIGT201610EH2R2MNE, PartId=100300400, Published=2021-02-03, Supplier 1=Digi-Key, Supplier 2=Mouser, Supplier Part Number 2=187-CIGT201610EH2R2M
LABEL1: library part Label_15x40, "PCA version label, stick-on, 15x40mm", Manufacturer="Ellco Etikett", Manufacturer Part Number=51945, Part number IPS=N.A., Part number NEMS=101200030, Artikkelnr Noca=N.A., Assembly="See section for \"Marking/ Stick-on label specification", Author=hany, Component Class=Mechanicals, Component Status=Active, ComponentLink1Description=Datasheet, ComponentLink1URL=N.A., ComponentLink2Description="Supplier link", ComponentLink2URL=N.A., Footprint Doc=Label, HelpURL=N.A., LatestRevisionDate=2023-01-05, Note=N.A., Pad Count=0, Part Number=Label_15x40, Part number Norautron=N.A., PartId=101200030, Published=2023-01-05, Supplier 1=N.A., Supplier 2=N.A., Supplier Part Number 1=N.A., Supplier Part Number 2=N.A.
LED1 LED2 LED3 LED4 LED5: library part "VS 25C7M5", "LED, Green, 0603, 573nm, Vf=2.0V, 24mcd, - 40 to +85°C", Manufacturer="Victory Electronics", Part number IPS="00000001274, 00000009961", Part number NEMS=101400097, Part number Norautron=26313411, Supplier Part Number 1=N.A., Artikkelnr Noca=13019193, Author=rsk, Component Class=Optoelectronics, Component Status=Active, ComponentLink1Description=Datasheet, ComponentLink1URL=N.A., ComponentLink2Description="Supplier link", ComponentLink2URL=N.A., Footprint Doc=0603, HelpURL="\\hizz\pro\app9717\Datasheet\optoelectronics\Victory Electronics\VS 25C7M5.pdf", LatestRevisionDate=2020-10-23, Manufacturer Part Number="VS 25C7M5", Note=N.A., Pad Count=2, Part Number="VS 25C7M5", PartId=101400097, Published=2017-08-21, Supplier 1="EC Partner", Supplier 2=N.A., Supplier Part Number 2=N.A.
LOGO1: library part "WEEE Symbol 3x4.5mm", "WEEE Directive symbol", Manufacturer=N.A., Part number NEMS=101100006, Artikkelnr Noca=N.A., Author=rsk, Component Class=Markings, Component Status=Active, ComponentLink1Description=Datasheet, ComponentLink1URL=N.A., ComponentLink2Description="Supplier link", ComponentLink2URL=N.A., Footprint Doc=WEEE_3x4.5mm, HelpURL=N.A., LatestRevisionDate=2023-03-07, Manufacturer Part Number=N.A., Note=N.A., Pad Count=0, Part Number="WEEE Symbol 3x4.5mm", Part number IPS=N.A., Part number Norautron=N.A., PartId=101100006, Published=2016-09-07, Supplier 1=N.A., Supplier 2=N.A., Supplier Part Number 1=N.A., Supplier Part Number 2=N.A.
LOGO2: "Segger logo, small size", Manufacturer=N.A., Part number NEMS=101100004, Artikkelnr Noca=N.A., Author=rsk, Component Class=Markings, Component Status=Active, ComponentLink1Description=Datasheet, ComponentLink1URL=N.A., ComponentLink2Description="Supplier link", ComponentLink2URL=N.A., Footprint Doc="Segger Logo S", HelpURL=N.A., LatestRevisionDate=2016-09-07, Manufacturer Part Number=N.A., Note=N.A., Pad Count=0, Part Number="Segger Logo S", Part number IPS=N.A., Part number Norautron=N.A., PartId=101100004, Published=2016-09-07, Supplier 1=N.A., Supplier 2=N.A., Supplier Part Number 1=N.A., Supplier Part Number 2=N.A.
LOGO3: library part "Nordic Logo lying", "Nordic logo lying", Manufacturer=N.A., Part number NEMS=101100001, Artikkelnr Noca=N.A., Author=rsk, Component Class=Markings, Component Status=Active, ComponentLink1Description=Datasheet, ComponentLink1URL=N.A., ComponentLink2Description="Supplier link", ComponentLink2URL=N.A., Footprint Doc="Nordic Logo", HelpURL=N.A., LatestRevisionDate=2017-03-20, Manufacturer Part Number=N.A., Note=N.A., Pad Count=0, Part Number="Nordic Logo lying", Part number IPS=N.A., Part number Norautron=N.A., PartId=101100001, Published=2017-09-01, Supplier 1=N.A., Supplier 2=N.A., Supplier Part Number 1=N.A., Supplier Part Number 2=N.A.
M1: "Low power System-in-Package with integrated LTE-M/NB-IoT modem and GPS", Manufacturer="Nordic Semiconductor", Part number IPS=N.A., Part number NEMS=102000407, Artikkelnr Noca=N.A., Author=getr, Component Class=Nordic_Devices, Component Status=Active, ComponentLink1Description=Datasheet, ComponentLink1URL=N.A., ComponentLink2Description="Supplier link", ComponentLink2URL=N.A., Footprint Doc=LGA-113, HelpURL=N.A., LatestRevisionDate=2025-04-09, Manufacturer Part Number=nRF9151-LACAA1A, Note=N.A., Pad Count=113, Part Number=nRF9151-LACAA1A, Part number Norautron=N.A., PartId=102000407, Published=2025-04-09, Supplier 1="Nordic Semiconductor", Supplier 2=N.A., Supplier Part Number 1=nRF9151-LACAA1A, Supplier Part Number 2=N.A.
P1 P3 P6: library part "Socket 1x8 SMD", "Socket 1x8, 2.54mm (100mil), SMD", Manufacturer=WCON, Manufacturer Part Number=2171-108MS0CUNR3, Part number IPS=N.A., Part number NEMS=100500412, Artikkelnr Noca=N.A., Author=rsk, Component Class=Connectors, Component Status=Active, ComponentLink1Description=Datasheet, ComponentLink1URL=N.A., ComponentLink2Description="Supplier link", ComponentLink2URL=N.A., Footprint Doc=SOCKET_1x8_SMD, HelpURL=N.A., LatestRevisionDate=2024-02-02, Note="(Replaced 2171-108MS0CUNR1)", Pad Count=8, Part Number="Socket 1x8 SMD", Part number Norautron=N.A., PartId=100500412, Published=2016-01-22, Supplier 1=Cabcon, Supplier 2=N.A., Supplier Part Number 1=2171-108MS0CUNR3, Supplier Part Number 2=N.A., System=Connector
P2: library part "Socket 1x6 SMD", "Socket 1x6, 2.54mm (100mil), SMD", Manufacturer=WCON, Manufacturer Part Number=2171-106MS0CUNR3, Part number IPS=N.A., Part number NEMS=100500408, Artikkelnr Noca=N.A., Author=rsk, Component Class=Connectors, Component Status=Active, ComponentLink1Description=Datasheet, ComponentLink1URL=N.A., ComponentLink2Description="Supplier link", ComponentLink2URL=N.A., Footprint Doc=SOCKET_1x6_SMD, HelpURL=N.A., LatestRevisionDate=2024-02-02, Note="(Replaced 2171-106MS0CUNR1)", Pad Count=6, Part Number="Socket 1x6 SMD", Part number Norautron=N.A., PartId=100500408, Published=2016-01-22, Supplier 1=Cabcon, Supplier 2=N.A., Supplier Part Number 1=2171-106MS0CUNR3, Supplier Part Number 2=N.A., System=Connector
P4: library part "Socket 1x10 SMD", "Socket 1x10, 2.54mm (100mil), SMD", Manufacturer=WCON, Manufacturer Part Number=2171-110MS0CUNR3, Part number IPS=N.A., Part number NEMS=100500416, Artikkelnr Noca=N.A., Author=rsk, Component Class=Connectors, Component Status=Active, ComponentLink1Description=Datasheet, ComponentLink1URL=N.A., ComponentLink2Description="Supplier link", ComponentLink2URL=N.A., Footprint Doc=SOCKET_1x10_SMD, HelpURL=N.A., LatestRevisionDate=2024-02-02, Note="(Replaced 2171-110MS0CUNR1)", Pad Count=10, Part Number="Socket 1x10 SMD", Part number Norautron=N.A., PartId=100500416, Published=2016-01-22, Supplier 1=Cabcon, Supplier 2=N.A., Supplier Part Number 1=2171-110MS0CUNR3, Supplier Part Number 2=N.A., System=Connector
P5: library part "Pin Header 2x3 SMD", "Pin Header 2x3, 2.54mm (100mil) SMD", Manufacturer=WCON, Manufacturer Part Number=1125-1203S0M116CR03, Part number IPS=N.A., Part number NEMS=100500242, Artikkelnr Noca=N.A., Author=rsk, Component Class=Connectors, Component Status=Active, ComponentLink1Description=Datasheet, ComponentLink1URL=N.A., ComponentLink2Description="Supplier link", ComponentLink2URL=N.A., Footprint Doc=HDR_2x3-SMD, HelpURL=\\hizz\pro\app9717\Datasheet\connectors\W-CON\1125-12XXXXMXXXXX.PDF, LatestRevisionDate=2024-02-02, Note="(Replaced 1125-1203S0M116CR03)", Pad Count=6, Part Number="Pin Header 2x3 SMD", Part number Norautron=N.A., PartId=100500242, Published=2016-01-22, Supplier 1=Cabcon, Supplier 2=N.A., Supplier Part Number 1=1125-1203S0M116CR03, Supplier Part Number 2=N.A., System=Connector
P7 P9 P12: library part "Pin List 1x8 SMD, N.C.", "Pin List 1x8, 2.54mm (100mil), SMD", Manufacturer=WCON, Manufacturer Part Number=1125-1108S0M116CR04, Part number IPS=N.A., Part number NEMS=100500330, Artikkelnr Noca=N.A., Assembly="Not mounted", Author=rsk, Component Class=Connectors, Component Status=Active, ComponentLink1Description=Datasheet, ComponentLink1URL=N.A., ComponentLink2Description="Supplier link", ComponentLink2URL=N.A., Footprint Doc=LIST_1x8_SMD, HelpURL=\\hizz\pro\app9717\Datasheet\connectors\W-CON\1125-11XXXXMXXXXX.pdf, LatestRevisionDate=2024-02-02, Note="(Replaced 1125-1108S0M116R2)", Pad Count=8, Part Number="Pin List 1x8 SMD, N.C.", Part number Norautron=N.A., PartId=100500330, Published=2016-01-22, Supplier 1=Cabcon, Supplier 2=N.A., Supplier Part Number 1=1125-1108S0M116CR04, Supplier Part Number 2=N.A., System=Connector
P8: library part "Pin List 1x6 SMD, N.C.", "Pin List 1x6, 2.54mm (100mil), SMD", Manufacturer=WCON, Manufacturer Part Number=1125-1106S0M116CR06, Part number IPS=N.A., Part number NEMS=100500321, Artikkelnr Noca=N.A., Assembly="Not mounted", Author=rsk, Component Class=Connectors, Component Status=Active, ComponentLink1Description=Datasheet, ComponentLink1URL=N.A., ComponentLink2Description="Supplier link", ComponentLink2URL=N.A., Footprint Doc=LIST_1x6_SMD, HelpURL=\\hizz\pro\app9717\Datasheet\connectors\W-CON\1125-11XXXXMXXXXX.pdf, LatestRevisionDate=2024-03-13, Note="(Replaced 1125-1106S0M116R2)", Pad Count=6, Part Number="Pin List 1x6 SMD, N.C.", Part number Norautron=N.A., PartId=100500321, Published=2016-03-29, Supplier 1=Cabcon, Supplier 2=N.A., Supplier Part Number 1=1125-1106S0M116CR06, Supplier Part Number 2=N.A., System=Connector
P10: library part "Pin List 1x10 SMD, N.C.", "Pin List 1x10, 2.54mm (100mil), SMD", Manufacturer=WCON, Manufacturer Part Number=1125-1110S0M116CR06, Part number IPS=N.A., Part number NEMS=100500338, Artikkelnr Noca=N.A., Assembly="Not mounted", Author=rsk, Component Class=Connectors, Component Status=Active, ComponentLink1Description=Datasheet, ComponentLink1URL=N.A., ComponentLink2Description="Supplier link", ComponentLink2URL=N.A., Footprint Doc=LIST_1x10_SMD, HelpURL=\\hizz\pro\app9717\Datasheet\connectors\W-CON\1125-11XXXXMXXXXX.pdf, LatestRevisionDate=2024-05-07, Note="(Replaced 1125-1110S0M116R2)", Pad Count=10, Part Number="Pin List 1x10 SMD, N.C.", Part number Norautron=N.A., PartId=100500338, Published=2016-03-29, Supplier 1=Cabcon, Supplier 2=N.A., Supplier Part Number 1=1125-1110S0M116CR06, Supplier Part Number 2=N.A., System=Connector
P11: library part "Socket 2x3 SMD, N.C.", "Socket 2x3, 2.54mm (100mil), SMD", Manufacturer=WCON, Manufacturer Part Number=2171-203MS0CUNR3, Part number IPS=N.A., Part number NEMS=100500434, Artikkelnr Noca=N.A., Assembly="Not mounted", Author=rsk, Component Class=Connectors, Component Status=Active, ComponentLink1Description=Datasheet, ComponentLink1URL=N.A., ComponentLink2Description="Supplier link", ComponentLink2URL=N.A., Footprint Doc=SOCKET_2x3_SMD-2.54mm, HelpURL=\\hizz\pro\app9717\Datasheet\connectors\W-CON\2171-2XXMXXCUNXX.pdf, LatestRevisionDate=2024-05-15, Note="(Replaced 2171-203MS0CUNR1)", Pad Count=6, Part Number="Socket 2x3 SMD, N.C.", Part number Norautron=N.A., PartId=100500434, Published=2014-06-10, Supplier 1=Cabcon, Supplier 2=N.A., Supplier Part Number 1=2171-203MS0CUNR3, Supplier Part Number 2=N.A., System=Connector
P13 P15 P17: library part "Pin Header 2x8, N.C.", "Pin Header 2x8, 2.54mm (100mil)", Manufacturer=N.A., Part number NEMS=100500270, Artikkelnr Noca=N.A., Assembly="Not mounted", Author=rsk, Component Class=Connectors, Component Status=Active, ComponentLink1Description=Datasheet, ComponentLink1URL=N.A., ComponentLink2Description="Supplier link", ComponentLink2URL=N.A., Footprint Doc=HDR_2x8, HelpURL=N.A., LatestRevisionDate=2009-12-12, Manufacturer Part Number=N.A., Note=N.A., Pad Count=16, Part Number="Pin Header 2x8, N.C.", Part number IPS=N.A., Part number Norautron=N.A., PartId=100500270, Published=2009-12-12, Supplier 1=N.A., Supplier 2=N.A., Supplier Part Number 1=N.A., Supplier Part Number 2=N.A., System=Connector
P14: library part "Pin Header 2x6, N.C.", "Pin Header 2x6, 2.54mm (100mil)", Manufacturer=N.A., Part number NEMS=100500265, Artikkelnr Noca=N.A., Assembly="Not mounted", Author=rsk, Component Class=Connectors, Component Status=Active, ComponentLink1Description=Datasheet, ComponentLink1URL=N.A., ComponentLink2Description="Supplier link", ComponentLink2URL=N.A., Footprint Doc=HDR_2x6, HelpURL=N.A., LatestRevisionDate=2014-07-04, Manufacturer Part Number=N.A., Note=N.A., Pad Count=12, Part Number="Pin Header 2x6, N.C.", Part number IPS=N.A., Part number Norautron=N.A., PartId=100500265, Published=2009-12-12, Supplier 1=N.A., Supplier 2=N.A., Supplier Part Number 1=N.A., Supplier Part Number 2=N.A., System=Connector
P16: library part "Pin Header 2x10, N.C.", "Pin Header 2x10, 2.54mm (100mil)", Manufacturer=N.A., Part number NEMS=100500274, Artikkelnr Noca=N.A., Assembly="Not mounted", Author=rsk, Component Class=Connectors, Component Status=Active, ComponentLink1Description=Datasheet, ComponentLink1URL=N.A., ComponentLink2Description="Supplier link", ComponentLink2URL=N.A., Footprint Doc=HDR_2x10, HelpURL=N.A., LatestRevisionDate=2017-02-02, Manufacturer Part Number=N.A., Note=N.A., Pad Count=20, Part Number="Pin Header 2x10, N.C.", Part number IPS=N.A., Part number Norautron=N.A., PartId=100500274, Published=2017-01-30, Supplier 1=N.A., Supplier 2=N.A., Supplier Part Number 1=N.A., Supplier Part Number 2=N.A., System=Connector
P18 P19: library part "Pin Header 2x5 SMD, 1.27mm, KS", "Pin Header 2x5, 1.27mm (50mil), SMD, Keying Shroud", Manufacturer=WCON, Manufacturer Part Number=3132-10MS0BK00R5, Part number IPS=N.A., Part number NEMS=100500261, Artikkelnr Noca=N.A., Author=rsk, Component Class=Connectors, Component Status=Active, ComponentLink1Description=Datasheet, ComponentLink1URL=N.A., ComponentLink2Description="Supplier link", ComponentLink2URL=N.A., Footprint Doc=HDR_2x5-SMD-1.27mm, HelpURL=\\hizz\pro\app9717\Datasheet\connectors\W-CON\3132-XXMXXBK00XX.pdf, LatestRevisionDate=2024-02-02, Note="(Replaced 3132-10MS0BK00R1)", Pad Count=10, Part Number="Pin Header 2x5 SMD, 1.27mm, KS", Part number Norautron=N.A., PartId=100500261, Published=2016-01-22, Supplier 1=Cabcon, Supplier 2=N.A., Supplier Part Number 1=3132-10MS0BK00R5, Supplier Part Number 2=N.A., System=Connector
P20: library part "Pin List 1x13 SMD", "Pin List 1x13, 2.54mm (100mil), SMD", Manufacturer=WCON, Manufacturer Part Number=1125-1113S0M116CR04, Part number IPS=N.A., Part number NEMS=100500345, Artikkelnr Noca=N.A., Author=rsk, Component Class=Connectors, Component Status=Active, ComponentLink1Description=Datasheet, ComponentLink1URL=N.A., ComponentLink2Description="Supplier link", ComponentLink2URL=N.A., Footprint Doc=LIST_1x13_SMD, HelpURL=N.A., LatestRevisionDate=2024-02-02, Note="(Replaced 1125-1113S0M116R2)", Pad Count=13, Part Number="Pin List 1x13 SMD", Part number Norautron=N.A., PartId=100500345, Published=2015-11-10, Supplier 1=Cabcon, Supplier 2=N.A., Supplier Part Number 1=1125-1113S0M116CR04, Supplier Part Number 2=N.A., System=Connector
P22: library part "Pin List Ang 1x4 SMD, 2.54mm", "Pin List 1x4, 2.54mm (100mil), Right Angled, SMD", Manufacturer=WCON, Manufacturer Part Number=1125B-1104S0Z135CR04, Part number IPS=N.A., Part number NEMS=100500358, Artikkelnr Noca=N.A., Author=rsk, Component Class=Connectors, Component Status=Active, ComponentLink1Description=Datasheet, ComponentLink1URL=N.A., ComponentLink2Description="Supplier link", ComponentLink2URL=N.A., Footprint Doc=LIST_ANG_1x4-SMD-2.54MM, HelpURL=N.A., LatestRevisionDate=2024-02-02, Note="(Replaced 1125B-1104S0Z135CR02)", Pad Count=4, Part Number="Pin List Ang 1x4 SMD, 2.54mm", Part number Norautron=N.A., PartId=100500358, Published=2015-01-23, Supplier 1=Cabcon, Supplier 2=N.A., Supplier Part Number 1=1125B-1104S0Z135CR04, Supplier Part Number 2=N.A., System=Connector
P24 P27: library part "Socket 2x6 SMD", "Socket 2x6, 2.54mm (100mil), SMD", Manufacturer=WCON, Manufacturer Part Number=2171-206MS0CUNR3, Part number IPS=N.A., Part number NEMS=100500439, Artikkelnr Noca=N.A., Author=rsk, Component Class=Connectors, Component Status=Active, ComponentLink1Description=Datasheet, ComponentLink1URL=N.A., ComponentLink2Description="Supplier link", ComponentLink2URL=N.A., Footprint Doc=SOCKET_2x6_SMD-2.54mm, HelpURL=N.A., LatestRevisionDate=2024-02-02, Note="(Replaced 2171-206MS0CUNR1)", Pad Count=12, Part Number="Socket 2x6 SMD", Part number Norautron=N.A., PartId=100500439, Published=2019-04-12, Supplier 1=Cabcon, Supplier 2=N.A., Supplier Part Number 1=2171-206MS0CUNR3, Supplier Part Number 2=N.A., System=Connector
  P27: Assembly="Not mounted"
P25: library part "Pin Header 2x10 SMD, 1.27mm, KS, SWD (Cabcon)", "Pin Header 2x10, 1.27mm (50mil), SMD, Keying Shroud, Removed Pin 7", Manufacturer=WCON, Manufacturer Part Number=3132-20MS0BK00R5, Part number IPS=N.A., Part number NEMS=100500841,100500280, Artikkelnr Noca=N.A., Author=kod1, Component Class=Connectors, Component Status=Active, ComponentLink1Description=Datasheet, ComponentLink1URL=N.A., ComponentLink2Description="Supplier link", ComponentLink2URL=N.A., Footprint Doc=HDR_2x10-SMD-1.27mm-SWD, HelpURL=N.A., LatestRevisionDate=2024-08-21, Note="(Replaced 3132-20MS0BK00R3)", Pad Count=19, Part Number="Pin Header 2x10 SMD, 1.27mm, KS, SWD (Cabcon)", Part number Norautron=N.A., PartId=100500841, Published=2023-12-14, Supplier 1=Cabcon, Supplier 2=N.A., Supplier Part Number 1=3132-20MS0BK00R5, Supplier Part Number 2=N.A., System=Connector